# Altium PCB MagicMirror.PcbDoc
Units mm, origin at the board's own origin, x right, y up, seen from the top; angles counter-clockwise.
Board outline 70 x 20 mm, 2 copper layers (Top Layer, Bottom Layer); 7 components, 6 nets, 33 pads, 0 vias.
Unrouted connection lines stored in the file: 21.
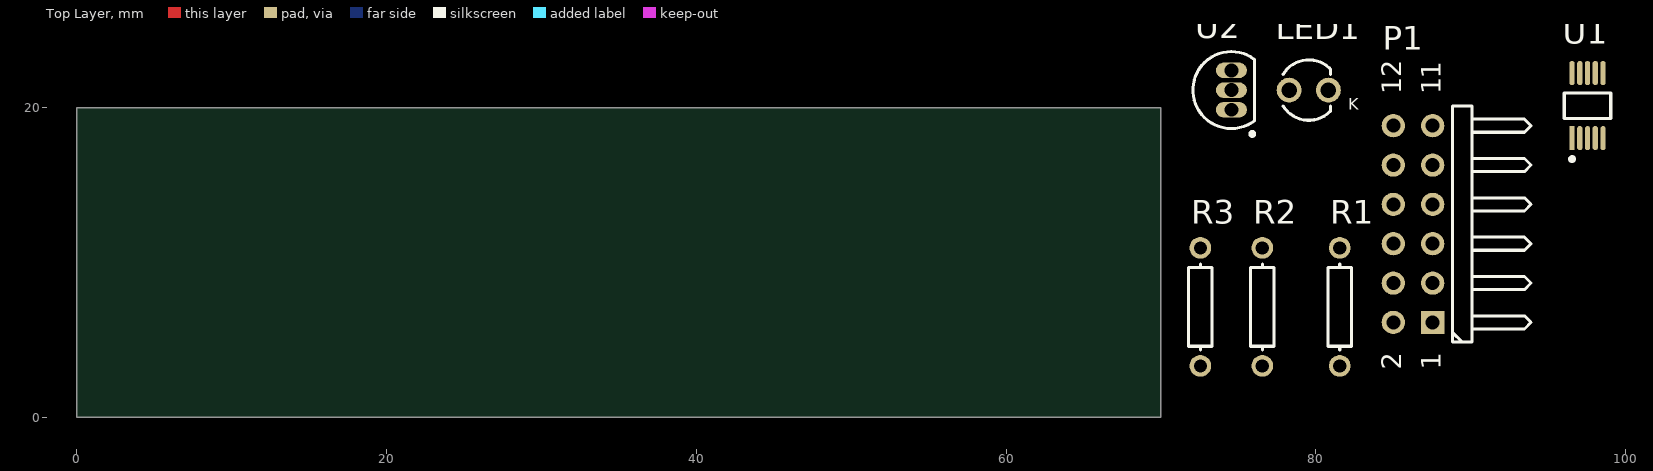
[diagram p0: Top Layer view]
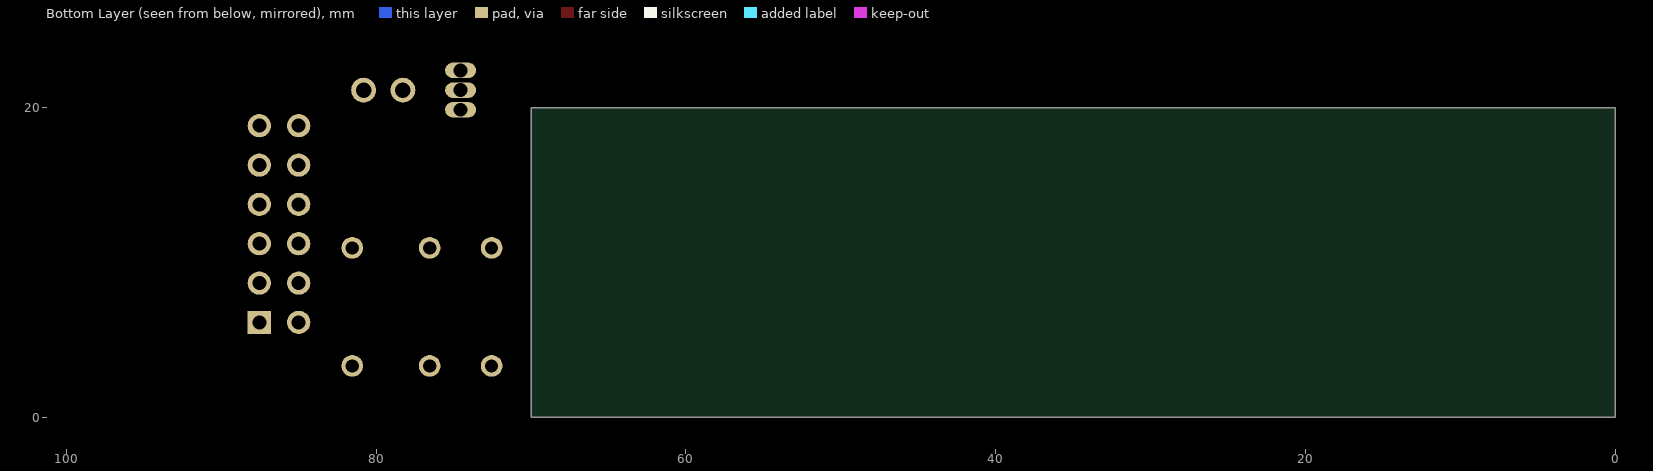
[diagram p1: Bottom Layer view, seen from below]

## Layer stack, top to bottom
Top Solder: solder mask 0.0102, Solder Resist, Dk 3.5
Top Layer: signal copper 0.0356
Dielectric 1: dielectric 0.32, FR-4, Dk 4.8
Bottom Layer: signal copper 0.0356
Bottom Solder: solder mask 0.0102, Solder Resist, Dk 3.5

## Board outline
0,0 70,0 70,20 0,20

## Design rules (kind name [scope] priority, off if disabled: settings)
Clearance [All] p1: gap=0.254 ignorepadtopadclearanceinfootprint=FALSE except(0: Arc-Hole Track-Hole SMDPad-Hole THPad-Hole Via-Hole Fill-Hole Poly-Hole Region-Hole Text-Hole)
PolygonConnect [All] p1: connectstyle=Relief reliefconductorwidth=0.254 reliefentries=4 polygonreliefangle="90 Angle" airgapwidth=0.254
RoomDefinition MagicMirror [InComponentClass('MagicMirror')] p1: confinementstyle=ConfineIn formatcopy=TRUE lockcomponents=FALSE outline 71.543,2.133 99.543,2.133 99.543,27.133 71.543,27.133
RoutingVias [All] p1: holewidth=0.711 width=1.27 viastyle="Through Hole" minholewidth=0.711 minwidth=1.27 maxholewidth=0.711 maxwidth=1.27
SolderMaskExpansion [All] p1: expansion=0.102 istentingtop=FALSE
Width [All] p1: maxlimit=0.254 minlimit=0.254 preferedwidth=0.254
30 further rules are at their usual default settings.

## Components (designator, comment, footprint, x,y, rotation, side; value= is the part's Value field where it differs from the comment)
LED1 "151031YS05900" "Type 3mm" 79.543,21.133 r0 top
P1 "Header 6X2H" HDR2X6H 87.543,6.133 r90 top
R1 "4.7k" AXIAL-0.3 81.543,7.133 r90 top value=1K
R2 "47k" AXIAL-0.3 76.543,7.133 r90 top
R3 "1k" AXIAL-0.3 72.543,7.133 r90 top value=1K
U1 "ADS1115IDGSR" FP-DGS0010A-IPC_B 97.543,20.133 r90 top
U2 "DS18B20+" Q3+1 74.543,21.133 r0 top

## Footprints (in the part's own frame and the unit in brackets; to place one, negate y for a bottom-side part, rotate by r counter-clockwise, add the part's x,y. Pads: shape width x height; smd on the part's side, far side on the other; paste and mask are expansions set on the pad)
AXIAL-0.3 [mm] "Axial Device, Thru-Hole; 2 Leads; 0.3 in Pin Spacing"
  round 1.4 hole 0.85: 1(-3.81,0) 2(3.81,0)
  silkscreen extent -2.77,-0.76 2.77,0.76
FP-DGS0010A-IPC_B [mm]
  rect 1.557x0.35 smd paste+0 mask+0: 1(-2.101,1)
  rrect100% 1.557x0.35 smd paste+0 mask+0: 2(-2.101,0.5) 3(-2.101,0) 4(-2.101,-0.5) 5(-2.101,-1) 6(2.101,-1) 7(2.101,-0.5) 8(2.101,0) 9(2.101,0.5) 10(2.101,1)
  silkscreen extent -3.58,-1.5 0.82,1.5
HDR2X6H [mm] "Connector; Header; 6x2 Position; Right Angle"
  rect 1.5x1.5 hole 0.9: 1(0,0)
  round 1.5 hole 0.9: 2(0,2.54) 3(2.54,0) 4(2.54,2.54) 5(5.08,0) 6(5.08,2.54) 7(7.62,0) 8(7.62,2.54) 9(10.16,0) 10(10.16,2.54) 11(12.7,0) 12(12.7,2.54)
  silkscreen extent -1.27,-6.35 13.97,-1.27
Q3+1 [mm] "TO, Flat Index; 3 In-Line, Axial Leads; Body Dia. 4.7mm; Leads 0.56 x 0.51 mm (max)"
  oval 2x1 hole 0.9: 1(0,-1.27) 2(0,0) 3(0,1.27)
  silkscreen extent -2.48,-2.95 1.5,2.48, body extent -2.48,-2.5 1.5,2.5, height 4.96
"Type 3mm" [mm] "THT, LED-3mm, 2pin- Body 4.15mm(max)"
  round 1.6 hole 1: 1(1.27,0) 2(-1.27,0)
  silkscreen extent -1.66,-1.95 1.4,1.95, body extent -1.93,-1.94 1.87,1.94, height 10.5

## Part data
LED1: library part CMP-1488-00003-1, "THT LED round mono-color color lens, WL-TMRC, Yellow", Emitting color=Yellow, Manufacturer="Wuerth Elektronik", ComponentLink1Description="Manufacturer URL", ComponentLink1URL=http://www.we-online.com, ComponentLink2Description=Datasheet, ComponentLink2URL=http://katalog.we-online.de/pbs/datasheet/7448042001.pdfhttp://katalog.we-online.de/pbs/datasheet/7448042001.pdfhttp://katalog.we-online.de/pbs/datasheet/7448042001.pdfhttp://katalog.we-online.de/pbs/datasheet/151031YS05900.pdf, PackageReference="Type 3mm", PartNumber=151031YS05900
P1: "Header, 6-Pin, Dual row, Right Angle", LatestRevisionDate=17-Jul-2002, LatestRevisionNote="Re-released for DXP Platform.", Publisher="Altium Limited"
R1 R2 R3: library part Res1, "Resistor", LatestRevisionDate=17-Jul-2002, LatestRevisionNote="Re-released for DXP Platform.", PackageDescription="Axial Device, Thru-Hole; 2 Leads; 0.3 in Pin Spacing", PackageReference=AXIAL-0.3, Published=8-Jun-2000, Publisher="Altium Limited"
  R2: 1K=1K
U1: library part CMP-0003-00385-3, "IC ADC 16BIT SIGMA-DELTA 10VSSOP", Case/Package=VSSOP, Max Operating Temperature=125°C, Max Supply Voltage=5.5V, Min Operating Temperature=-40°C, Min Supply Voltage=2V, Package Quantity=2500, Power Dissipation=900uW, Contact Plating=Gold, Conversion Rate=0.86KS/s, Integral Nonlinearity (INL)=1LSB, Interface=I2C, Lead Free="Lead Free", Max Supply Voltage (DC)=5.5V, Min Supply Voltage (DC)=2V, Number of A/D Converters=1, Number of Bits=16, Number of Converters=1, Number of Inputs=4, Number of Pins=10, Packaging="Tape and Reel", Polarity=Bipolar, Radiation Hardening=No, REACH SVHC="No SVHC", Resolution=16b, RoHS Compliant=Yes, Sampling Rate=860S/s, Series=-, Supply Type=Single
U2: library part CMP-0253-00003-1, "Programmable Resolution Digital Thermometer, 1-Wire Interface, ±0.5°C Accuracy, 3-Pin TO92, -55°C to +125°C, Pb-Free", Code_JEDEC=TO-226-AA, ComponentLink1Description="Manufacturer URL", ComponentLink1URL=http://www.maxim-ic.com, ComponentLink2Description=Datasheet, ComponentLink2URL=http://datasheets.maxim-ic.com/en/ds/DS18B20.pdf, DatasheetVersion=2007, PackageDescription="TO-92 Package, Body Dia. 4.7mm; Leads 0.51 x 0.51 mm (max), Pb-Free", PackageReference=Q3+1, PackageVersion="revB, 2009"

## Nets (pads, with @x,y where several pads share a name; then routed paths per layer and width w, separated by ;. In a path a pad name is that pad's centre, name@x,y a point inside that pad or via, vN(x,y) a via of type N, cw(c..) or ccw(c..) an arc to the next point about the centre after c; other vN are vias at no path point)
3.3VCC: P1.1 R1.1 R2.2 U1.8 U2.3
GND: LED1.2 P1.3 P1.5 P1.9 U1.1 U1.3 U1.4 U1.5 U1.6 U1.9 U1.10 U2.1
GPIO.0: P1.11 R1.2 U2.2
GPIO.7: P1.7 U1.2
LIGHT_SENSOR: R3.1 U1.7
NetLED1_1: LED1.1 R2.1 R3.2
pads on no net: P1.2 P1.4 P1.6 P1.8 P1.10 P1.12

## Text inside footprints (layer, text, board x,y; h text height)
LED1: Mechanical 15 "K" at 82.083,19.863 h0.76; Top Overlay "K" at 82.083,19.863 h0.76
P1: Top Overlay "12" at 85.511,20.865 h1.27 r90; Top Overlay "1" at 88.051,21.881 h1.27 r90; Top Overlay "1" at 88.051,20.865 h1.27 r90; Top Overlay "1" at 88.051,3.085 h1.27 r90; Top Overlay "2" at 85.511,3.085 h1.27 r90